# EAGLE board UCirKit30x20-0721 (EAGLE 7.3.0)

Size 132.06 x 68.25 mm. Coordinates in mm from the lower left corner, seen from the top.
Outline: 0,0 132.06,0 132.06,68.25 0,68.25 0,0
Copper layers (1*2*15*16): Top 0.035mm / dielectric 0.2mm / Route2 0.0175mm / dielectric 0.3mm / Route15 0.0175mm / dielectric 0.2mm / Bottom 0.035mm
Design rules "SeeedStudio_4layer_DRU_no_angle_20140221": minimum track width 8mil, minimum drill 12mil, track to track 8mil, track to pad 8mil, pad to pad 8mil, via to via 8mil, smd to smd 0mil, copper to edge 10mil, drill to drill 8mil, minimum pad ring 6mil, minimum via ring 4mil, stop-mask expansion 4mil, vias tented up to drill 100mil, thermal gap 10mil

## Footprints (pad centres in the part's own frame; a part is rotated, then mirrored left to right if it is on the bottom)
1X15 = drill 1.016 pad 1.88: 1 0,0; 2 2.54,0; 3 5.08,0; 4 7.62,0; 5 10.16,0; 6 12.7,0; 7 15.24,0; 8 17.78,0; 9 20.32,0; 10 22.86,0; 11 25.4,0; 12 27.94,0; 13 30.48,0; 14 33.02,0; 15 35.56,0
1X05-1.27MM = drill 0.508 pad 1: 1 0,0; 2 1.27,0; 3 2.54,0; 4 3.81,0; 5 5.08,0

## Placement (x,y rotation side)
JP1  [1X15]  16.51,50.8 270 top
JP3  [1X15]  21.59,50.8 270 top
JP5  [1X15]  26.67,50.8 270 top
JP7  [1X15]  31.75,50.8 270 top
JP9  [1X15]  36.83,50.8 270 top
JP11  [1X15]  41.91,50.8 270 top
JP13  [1X15]  46.99,50.8 270 top
JP15  [1X15]  52.07,50.8 270 top
JP17  [1X15]  57.15,50.8 270 top
JP19  [1X15]  62.23,50.8 270 top
JP21  [1X15]  67.31,50.8 270 top
JP23  [1X15]  72.39,50.8 270 top
JP25  [1X15]  77.47,50.8 270 top
JP27  [1X15]  82.55,50.8 270 top
JP29  [1X15]  87.63,50.8 270 top
JP31  [1X15]  92.71,50.8 270 top
JP33  [1X15]  97.79,50.8 270 top
JP35  [1X15]  102.87,50.8 270 top
JP37  [1X15]  107.95,50.8 270 top
JP39  [1X15]  113.03,50.8 270 top
JP42  [1X05-1.27MM]  8.26,57.78 0 top
JP43  [1X05-1.27MM]  10.16,19.68 270 top
JP47  [1X05-1.27MM]  10.16,51.44 270 top
JP48  [1X05-1.27MM]  10.16,45.09 270 top
JP49  [1X05-1.27MM]  10.16,38.73 270 top
JP53  [1X05-1.27MM]  10.16,32.38 270 top
JP54  [1X05-1.27MM]  10.16,26.04 270 top
JP55  [1X05-1.27MM]  103.5,6.99 0 top
JP59  [1X05-1.27MM]  8.26,51.44 270 top
JP60  [1X05-1.27MM]  8.26,45.09 270 top
JP61  [1X05-1.27MM]  8.26,38.73 270 top
JP65  [1X05-1.27MM]  8.26,32.38 270 top
JP66  [1X05-1.27MM]  8.26,26.04 270 top
JP67  [1X05-1.27MM]  97.16,6.99 0 top
JP71  [1X05-1.27MM]  121.28,50.8 270 top
JP72  [1X05-1.27MM]  121.28,44.45 270 top
JP73  [1X05-1.27MM]  121.28,38.1 270 top
JP77  [1X05-1.27MM]  121.28,31.75 270 top
JP78  [1X05-1.27MM]  121.28,25.4 270 top
JP79  [1X05-1.27MM]  90.81,6.99 0 top
JP83  [1X05-1.27MM]  119.38,50.8 270 top
JP84  [1X05-1.27MM]  119.38,44.45 270 top
JP85  [1X05-1.27MM]  119.38,38.1 270 top
JP89  [1X05-1.27MM]  97.16,57.78 0 top
JP90  [1X05-1.27MM]  103.5,57.78 0 top
JP91  [1X05-1.27MM]  109.86,57.78 0 top
JP95  [1X05-1.27MM]  119.38,31.75 270 top
JP96  [1X05-1.27MM]  119.38,25.4 270 top
JP97  [1X05-1.27MM]  119.38,19.05 270 top
JP101  [1X05-1.27MM]  90.81,57.78 0 top
JP102  [1X05-1.27MM]  109.86,6.99 0 top
JP103  [1X05-1.27MM]  116.2,6.99 0 top
JP107  [1X05-1.27MM]  121.28,19.05 270 top
JP108  [1X05-1.27MM]  78.11,57.78 0 top
JP109  [1X05-1.27MM]  84.45,57.78 0 top
JP113  [1X05-1.27MM]  8.26,6.99 0 top
JP114  [1X05-1.27MM]  116.2,57.78 0 top
JP115  [1X05-1.27MM]  33.66,57.78 0 top
JP119  [1X05-1.27MM]  40.01,57.78 0 top
JP120  [1X05-1.27MM]  46.35,57.78 0 top
JP121  [1X05-1.27MM]  52.7,57.78 0 top
JP125  [1X05-1.27MM]  14.61,57.78 0 top
JP126  [1X05-1.27MM]  20.95,57.78 0 top
JP127  [1X05-1.27MM]  27.3,57.78 0 top
JP131  [1X05-1.27MM]  59.05,57.78 0 top
JP132  [1X05-1.27MM]  65.41,57.78 0 top
JP133  [1X05-1.27MM]  71.75,57.78 0 top
JP137  [1X05-1.27MM]  14.61,6.99 0 top
JP138  [1X05-1.27MM]  20.95,6.99 0 top
JP139  [1X05-1.27MM]  8.26,19.68 270 top
JP143  [1X05-1.27MM]  27.3,6.99 0 top
JP144  [1X05-1.27MM]  71.75,6.99 0 top
JP145  [1X05-1.27MM]  78.11,6.99 0 top
JP149  [1X05-1.27MM]  52.7,6.99 0 top
JP150  [1X05-1.27MM]  59.05,6.99 0 top
JP151  [1X05-1.27MM]  65.41,6.99 0 top
JP155  [1X05-1.27MM]  33.66,6.99 0 top
JP156  [1X05-1.27MM]  40.01,6.99 0 top
JP157  [1X05-1.27MM]  46.35,6.99 0 top
JP161  [1X05-1.27MM]  84.45,6.99 0 top

## Library data of the parts
JP1 JP3 JP5 JP7 JP9 JP11 JP13 JP15 JP17 JP19 JP21 JP23 JP25 JP27 JP29 JP31 JP33 JP35 JP37 JP39 JP42 JP43 JP47-JP49 JP53-JP55 JP59-JP61 JP65-JP67 JP71-JP73 JP77-JP79 JP83-JP85 JP89-JP91 JP95-JP97 JP101-JP103 JP107-JP109 JP113-JP115 JP119-JP121 JP125-JP127 JP131-JP133 JP137-JP139 JP143-JP145 JP149-JP151 JP155-JP157 JP161 = SparkFun-Connectors

## Nets
N$2: JP59.5
N$3: JP59.4
N$4: JP59.3
N$5: JP59.2
N$6: JP59.1
N$7: JP60.5
N$8: JP60.4
N$9: JP60.3
N$10: JP60.2
N$11: JP60.1
N$12: JP61.5
N$13: JP61.4
N$14: JP61.3
N$15: JP61.2
N$16: JP61.1
N$17: JP119.5
N$18: JP119.4
N$19: JP119.3
N$20: JP119.2
N$21: JP119.1
N$22: JP120.5
N$23: JP120.4
N$24: JP120.3
N$25: JP120.2
N$26: JP120.1
N$27: JP121.5
N$28: JP121.4
N$29: JP121.3
N$30: JP121.2
N$31: JP121.1
NEW_0: JP1.10 JP42.1
NEW_1: JP1.11 JP42.2
NEW_2: JP1.6 JP42.3
NEW_3: JP1.5 JP42.4
NEW_4: JP1.7 JP42.5
NEW_6: JP11.15 JP85.2
NEW_7: JP1.12 JP113.4
NEW_8: JP83.5
NEW_9: JP1.13 JP113.5
NEW_11: JP3.14
NEW_12: JP1.15
NEW_14: JP3.13
NEW_15: JP7.14
NEW_16: JP7.15
NEW_19: JP3.15
NEW_21: JP9.14
NEW_22: JP9.12
NEW_23: JP9.13
NEW_25: JP1.14 JP91.1
NEW_26: JP91.2
NEW_27: JP91.3
NEW_28: JP91.4
NEW_29: JP91.5
NEW_30: JP90.1
NEW_31: JP3.8 JP90.2
NEW_32: JP3.10 JP90.3
NEW_33: JP3.11 JP90.4
NEW_34: JP3.9 JP90.5
NEW_35: JP89.1
NEW_36: JP89.2
NEW_37: JP89.3
NEW_38: JP89.4
NEW_39: JP5.11 JP89.5
NEW_40: JP9.15
NEW_43: JP13.13
NEW_44: JP13.14
NEW_48: JP11.10
NEW_49: JP11.11
NEW_50: JP3.12
NEW_53: JP1.8
NEW_54: JP1.9
NEW_55: JP97.1
NEW_56: JP97.2
NEW_57: JP97.3
NEW_58: JP97.4
NEW_59: JP15.11 JP97.5
NEW_60: JP15.13 JP96.1
NEW_61: JP15.14 JP96.2
NEW_62: JP15.12 JP96.3
NEW_63: JP15.15 JP96.4
NEW_64: JP96.5
NEW_65: JP95.1
NEW_66: JP95.2
NEW_67: JP95.3
NEW_68: JP95.4
NEW_69: JP95.5
NEW_70: JP11.12
NEW_71: JP11.13
NEW_73: JP5.12
NEW_74: JP5.13
NEW_75: JP11.14
NEW_80: JP17.9
NEW_81: JP17.10
NEW_82: JP17.11
NEW_83: JP13.10
NEW_84: JP13.11
NEW_85: JP103.1
NEW_86: JP103.2
NEW_87: JP103.3
NEW_88: JP5.6 JP103.4
NEW_89: JP5.7 JP103.5
NEW_90: JP5.15 JP102.1
NEW_91: JP5.14 JP102.2
NEW_92: JP102.3
NEW_93: JP5.8 JP102.4
NEW_94: JP5.9 JP102.5
NEW_95: JP101.1
NEW_96: JP101.2
NEW_97: JP101.3
NEW_98: JP101.4
NEW_99: JP7.9 JP101.5
NEW_100: JP17.13
NEW_101: JP17.12
NEW_102: JP17.14
NEW_103: JP17.15
NEW_105: JP13.9
NEW_110: JP13.8
NEW_111: JP13.12
NEW_115: JP109.1
NEW_116: JP109.2
NEW_117: JP109.3
NEW_118: JP15.8 JP109.4
NEW_119: JP15.6 JP109.5
NEW_120: JP108.1
NEW_121: JP108.2
NEW_122: JP19.7 JP108.3
NEW_123: JP19.8 JP108.4
NEW_124: JP19.9 JP108.5
NEW_125: JP19.10 JP107.1
NEW_126: JP19.11 JP107.2
NEW_127: JP19.12 JP107.3
NEW_128: JP19.13 JP107.4
NEW_129: JP19.14 JP107.5
NEW_130: JP7.12
NEW_131: JP7.10
NEW_132: JP7.11
NEW_133: JP7.13
NEW_135: JP15.7
NEW_140: JP15.9
NEW_141: JP15.10
NEW_145: JP5.10 JP114.1
NEW_146: JP114.2
NEW_147: JP114.3
NEW_148: JP114.4
NEW_149: JP114.5
NEW_150: JP9.7 JP113.1
NEW_151: JP9.8 JP113.2
NEW_152: JP113.3
NEW_155: JP17.4
NEW_156: JP17.5
NEW_157: JP17.6
NEW_158: JP17.7
NEW_159: JP17.8
NEW_161: JP19.15
NEW_167: JP83.1
NEW_168: JP83.2
NEW_169: JP83.3
NEW_170: JP83.4
NEW_171: JP21.12 JP84.1
NEW_172: JP21.10 JP84.2
NEW_173: JP84.3
NEW_174: JP21.11 JP84.4
NEW_175: JP21.14 JP84.5
NEW_176: JP21.13 JP85.1
NEW_177: JP85.3
NEW_178: JP85.4
NEW_179: JP85.5
NEW_186: JP1.2
NEW_187: JP1.3
NEW_188: JP1.4
NEW_191: JP3.1
NEW_193: JP3.2
NEW_195: JP7.4 JP49.1
NEW_196: JP7.7 JP49.2
NEW_197: JP7.6 JP49.3
NEW_198: JP7.5 JP49.4
NEW_199: JP7.8 JP49.5
NEW_200: JP48.1
NEW_201: JP48.2
NEW_202: JP48.3
NEW_203: JP48.4
NEW_204: JP48.5
NEW_205: JP3.3 JP47.1
NEW_206: JP3.5 JP47.2
NEW_207: JP3.4 JP47.3
NEW_208: JP3.6 JP47.4
NEW_209: JP3.7 JP47.5
NEW_210: JP9.9
NEW_214: JP19.2
NEW_215: JP9.10
NEW_216: JP9.11
NEW_222: JP11.5
NEW_223: JP11.6
NEW_224: JP11.7
NEW_225: JP21.15 JP55.1
NEW_226: JP55.2
NEW_227: JP55.3
NEW_228: JP55.4
NEW_229: JP55.5
NEW_230: JP19.3 JP54.1
NEW_231: JP23.8 JP54.2
NEW_232: JP23.9 JP54.3
NEW_233: JP54.4
NEW_234: JP23.10 JP54.5
NEW_235: JP19.4 JP53.1
NEW_236: JP19.5 JP53.2
NEW_237: JP19.6 JP53.3
NEW_238: JP53.4
NEW_239: JP53.5
NEW_240: JP9.1
NEW_246: JP7.1
NEW_248: JP7.2
NEW_250: JP7.3
NEW_251: JP5.1
NEW_252: JP5.2
NEW_255: JP9.2
NEW_256: JP9.3
NEW_257: JP9.5
NEW_258: JP9.6
NEW_259: JP9.4
NEW_261: JP5.3
NEW_265: JP5.5
NEW_266: JP5.4
NEW_268: JP37.1
NEW_270: JP11.8
NEW_271: JP11.9
NEW_274: JP21.5
NEW_282: JP13.3
NEW_283: JP13.4
NEW_284: JP13.5
NEW_285: JP23.12 JP67.1
NEW_286: JP23.13 JP67.2
NEW_287: JP23.11 JP67.3
NEW_288: JP23.14 JP67.4
NEW_289: JP23.15 JP67.5
NEW_290: JP66.1
NEW_291: JP21.7 JP66.2
NEW_292: JP66.3
NEW_293: JP66.4
NEW_294: JP66.5
NEW_295: JP21.6 JP65.1
NEW_296: JP21.9 JP65.2
NEW_297: JP21.8 JP65.3
NEW_298: JP65.4
NEW_299: JP65.5
NEW_301: JP39.3
NEW_304: JP39.1
NEW_306: JP39.5
NEW_309: JP39.4
NEW_311: JP39.8
NEW_315: JP11.1 JP73.1
NEW_316: JP11.2 JP73.2
NEW_317: JP11.3 JP73.3
NEW_318: JP11.4 JP73.4
NEW_319: JP73.5
NEW_320: JP35.2 JP72.1
NEW_321: JP72.2
NEW_322: JP35.1 JP72.3
NEW_323: JP72.4
NEW_324: JP13.1 JP72.5
NEW_325: JP71.1
NEW_326: JP37.2 JP71.2
NEW_327: JP71.3
NEW_328: JP71.4
NEW_329: JP35.3 JP71.5
NEW_330: JP13.6
NEW_331: JP77.5
NEW_333: JP13.2
NEW_337: JP13.7
NEW_341: JP15.1
NEW_342: JP15.2
NEW_343: JP15.3
NEW_344: JP15.4
NEW_346: JP23.3 JP77.1
NEW_347: JP77.2
NEW_348: JP23.4 JP77.3
NEW_349: JP23.5 JP77.4
NEW_350: JP23.6 JP78.1
NEW_351: JP23.7 JP78.2
NEW_352: JP78.3
NEW_353: JP78.4
NEW_354: JP78.5
NEW_355: JP79.1
NEW_356: JP79.2
NEW_357: JP79.3
NEW_358: JP79.4
NEW_359: JP25.6 JP79.5
NEW_360: JP15.5 JP43.1
NEW_361: JP43.2
NEW_362: JP43.3
NEW_363: JP43.4
NEW_364: JP43.5
NEW_365: JP115.1
NEW_366: JP33.5 JP115.2
NEW_367: JP115.3
NEW_368: JP33.4 JP115.4
NEW_369: JP115.5
NEW_370: JP39.2
NEW_372: JP35.4
NEW_374: JP33.6
NEW_376: JP37.6
NEW_377: JP37.5
NEW_379: JP35.7
NEW_380: JP39.7
NEW_381: JP39.6
NEW_382: JP37.7
NEW_384: JP35.9
NEW_385: JP17.1
NEW_386: JP17.2
NEW_387: JP17.3
NEW_390: JP37.15
NEW_391: JP21.3
NEW_393: JP19.1
NEW_397: JP39.13
NEW_398: JP21.1
NEW_399: JP21.2
NEW_402: JP35.8
NEW_405: JP37.10
NEW_408: JP37.8
NEW_409: JP33.11
NEW_410: JP21.4
NEW_413: JP23.1
NEW_414: JP23.2
NEW_415: JP33.3 JP127.1
NEW_416: JP127.2
NEW_417: JP37.14 JP127.3
NEW_418: JP127.4
NEW_419: JP35.15 JP127.5
NEW_420: JP126.1
NEW_421: JP33.1 JP126.2
NEW_422: JP126.3
NEW_423: JP126.4
NEW_424: JP33.2 JP126.5
NEW_425: JP33.9 JP125.1
NEW_426: JP125.2
NEW_427: JP37.4 JP125.3
NEW_428: JP37.3 JP125.4
NEW_429: JP125.5
NEW_431: JP35.12
NEW_433: JP37.9
NEW_437: JP33.14
NEW_438: JP33.15
NEW_441: JP35.14
NEW_442: JP39.14
NEW_443: JP35.13
NEW_444: JP39.15
NEW_445: JP31.8 JP133.1
NEW_446: JP31.2 JP133.2
NEW_447: JP133.3
NEW_448: JP31.7 JP133.4
NEW_449: JP31.3 JP133.5
NEW_450: JP132.1
NEW_451: JP31.11 JP132.2
NEW_452: JP132.3
NEW_453: JP132.4
NEW_454: JP132.5
NEW_455: JP131.1
NEW_456: JP31.13 JP131.2
NEW_457: JP131.3
NEW_458: JP33.10 JP131.4
NEW_459: JP131.5
NEW_466: JP37.12
NEW_469: JP37.11
NEW_472: JP31.5
NEW_473: JP39.12
NEW_475: JP37.13 JP139.1
NEW_476: JP139.2
NEW_477: JP139.3
NEW_478: JP39.9 JP139.4
NEW_479: JP39.10 JP139.5
NEW_480: JP161.1
NEW_481: JP161.2
NEW_482: JP161.3
NEW_483: JP31.6 JP161.4
NEW_484: JP31.4 JP161.5
NEW_485: JP138.1
NEW_486: JP25.3 JP138.2
NEW_487: JP138.3
NEW_488: JP25.1 JP138.4
NEW_489: JP138.5
NEW_490: JP137.1
NEW_491: JP25.5 JP137.2
NEW_492: JP25.4 JP137.3
NEW_493: JP25.7 JP137.4
NEW_494: JP25.8 JP137.5
NEW_495: JP39.11
NEW_499: JP29.9
NEW_500: JP25.2
NEW_501: JP25.14
NEW_502: JP25.15
NEW_504: JP29.7
NEW_505: JP25.11
NEW_506: JP25.10
NEW_508: JP25.9
NEW_510: JP29.15 JP145.1
NEW_511: JP27.1 JP145.2
NEW_512: JP35.10 JP145.3
NEW_513: JP145.4
NEW_514: JP145.5
NEW_515: JP29.13 JP144.1
NEW_516: JP29.1 JP144.2
NEW_517: JP31.12 JP144.3
NEW_518: JP144.4
NEW_519: JP29.14 JP144.5
NEW_520: JP143.1
NEW_521: JP29.10 JP143.2
NEW_522: JP35.5 JP143.3
NEW_523: JP35.6 JP143.4
NEW_524: JP143.5
NEW_525: JP25.13
NEW_529: JP25.12
NEW_530: JP27.2
NEW_540: JP29.4 JP151.1
NEW_541: JP151.2
NEW_542: JP33.8 JP151.3
NEW_543: JP151.4
NEW_544: JP151.5
NEW_545: JP150.1
NEW_546: JP29.5 JP150.2
NEW_547: JP150.3
NEW_548: JP150.4
NEW_549: JP150.5
NEW_550: JP27.3 JP149.1
NEW_551: JP27.4 JP149.2
NEW_552: JP27.14 JP149.3
NEW_553: JP149.4
NEW_554: JP149.5
NEW_555: JP27.5
NEW_556: JP27.6
NEW_557: JP27.7
NEW_558: JP27.8
NEW_559: JP27.9
NEW_560: JP35.11
NEW_561: JP33.12
NEW_563: JP29.8
NEW_564: JP29.6
NEW_565: JP27.15
NEW_569: JP31.14
NEW_570: JP157.1
NEW_571: JP157.2
NEW_572: JP157.3
NEW_573: JP27.10 JP157.4
NEW_574: JP157.5
NEW_575: JP27.11 JP156.1
NEW_576: JP27.12 JP156.2
NEW_577: JP156.3
NEW_578: JP31.15 JP156.4
NEW_579: JP27.13 JP156.5
NEW_580: JP155.1
NEW_581: JP155.2
NEW_582: JP33.13 JP155.3
NEW_583: JP155.4
NEW_584: JP33.7 JP155.5
NEW_586: JP31.10
NEW_587: JP31.9
NEW_589: JP31.1
NEW_591: JP29.12
NEW_593: JP29.2
NEW_596: JP29.11
NEW_597: JP29.3
NEW_599: JP1.1

## Tracks (layer width: path | path; a pad name or v marks a point on that pad's centre or on a via)
NEW_0  (1 unrouted)
NEW_1  (1 unrouted)
NEW_2  (1 unrouted)
NEW_3  (1 unrouted)
NEW_4  (1 unrouted)
NEW_6  (1 unrouted)
NEW_7  (1 unrouted)
NEW_9  (1 unrouted)
NEW_25  (1 unrouted)
NEW_31  (1 unrouted)
NEW_32  (1 unrouted)
NEW_33  (1 unrouted)
NEW_34  (1 unrouted)
NEW_39  (1 unrouted)
NEW_59  (1 unrouted)
NEW_60  (1 unrouted)
NEW_61  (1 unrouted)
NEW_62  (1 unrouted)
NEW_63  (1 unrouted)
NEW_88  (1 unrouted)
NEW_89  (1 unrouted)
NEW_90  (1 unrouted)
NEW_91  (1 unrouted)
NEW_93  (1 unrouted)
NEW_94  (1 unrouted)
NEW_99  (1 unrouted)
NEW_118  (1 unrouted)
NEW_119  (1 unrouted)
NEW_122  (1 unrouted)
NEW_123  (1 unrouted)
NEW_124  (1 unrouted)
NEW_125  (1 unrouted)
NEW_126  (1 unrouted)
NEW_127  (1 unrouted)
NEW_128  (1 unrouted)
NEW_129  (1 unrouted)
NEW_145  (1 unrouted)
NEW_150  (1 unrouted)
NEW_151  (1 unrouted)
NEW_171  (1 unrouted)
NEW_172  (1 unrouted)
NEW_174  (1 unrouted)
NEW_175  (1 unrouted)
NEW_176  (1 unrouted)
NEW_195  (1 unrouted)
NEW_196  (1 unrouted)
NEW_197  (1 unrouted)
NEW_198  (1 unrouted)
NEW_199  (1 unrouted)
NEW_205  (1 unrouted)
NEW_206  (1 unrouted)
NEW_207  (1 unrouted)
NEW_208  (1 unrouted)
NEW_209  (1 unrouted)
NEW_225  (1 unrouted)
NEW_230  (1 unrouted)
NEW_231  (1 unrouted)
NEW_232  (1 unrouted)
NEW_234  (1 unrouted)
NEW_235  (1 unrouted)
NEW_236  (1 unrouted)
NEW_237  (1 unrouted)
NEW_285  (1 unrouted)
NEW_286  (1 unrouted)
NEW_287  (1 unrouted)
NEW_288  (1 unrouted)
NEW_289  (1 unrouted)
NEW_291  (1 unrouted)
NEW_295  (1 unrouted)
NEW_296  (1 unrouted)
NEW_297  (1 unrouted)
NEW_315  (1 unrouted)
NEW_316  (1 unrouted)
NEW_317  (1 unrouted)
NEW_318  (1 unrouted)
NEW_320  (1 unrouted)
NEW_322  (1 unrouted)
NEW_324  (1 unrouted)
NEW_326  (1 unrouted)
NEW_329  (1 unrouted)
NEW_346  (1 unrouted)
NEW_348  (1 unrouted)
NEW_349  (1 unrouted)
NEW_350  (1 unrouted)
NEW_351  (1 unrouted)
NEW_359  (1 unrouted)
NEW_360  (1 unrouted)
NEW_366  (1 unrouted)
NEW_368  (1 unrouted)
NEW_415  (1 unrouted)
NEW_417  (1 unrouted)
NEW_419  (1 unrouted)
NEW_421  (1 unrouted)
NEW_424  (1 unrouted)
NEW_425  (1 unrouted)
NEW_427  (1 unrouted)
NEW_428  (1 unrouted)
NEW_445  (1 unrouted)
NEW_446  (1 unrouted)
NEW_448  (1 unrouted)
NEW_449  (1 unrouted)
NEW_451  (1 unrouted)
NEW_456  (1 unrouted)
NEW_458  (1 unrouted)
NEW_475  (1 unrouted)
NEW_478  (1 unrouted)
NEW_479  (1 unrouted)
NEW_483  (1 unrouted)
NEW_484  (1 unrouted)
NEW_486  (1 unrouted)
NEW_488  (1 unrouted)
NEW_491  (1 unrouted)
NEW_492  (1 unrouted)
NEW_493  (1 unrouted)
NEW_494  (1 unrouted)
NEW_510  (1 unrouted)
NEW_511  (1 unrouted)
NEW_512  (1 unrouted)
NEW_515  (1 unrouted)
NEW_516  (1 unrouted)
NEW_517  (1 unrouted)
NEW_519  (1 unrouted)
NEW_521  (1 unrouted)
NEW_522  (1 unrouted)
NEW_523  (1 unrouted)
NEW_540  (1 unrouted)
NEW_542  (1 unrouted)
NEW_546  (1 unrouted)
NEW_550  (1 unrouted)
NEW_551  (1 unrouted)
NEW_552  (1 unrouted)
NEW_573  (1 unrouted)
NEW_575  (1 unrouted)
NEW_576  (1 unrouted)
NEW_578  (1 unrouted)
NEW_579  (1 unrouted)
NEW_582  (1 unrouted)
NEW_584  (1 unrouted)